# Altium PCB PCBvoice.PcbDoc
Units mm, origin at the board's own origin, x right, y up, seen from the top; angles counter-clockwise.
Board outline 100 x 60 mm, 2 copper layers (Top Layer, Bottom Layer); 35 components, 24 nets, 82 pads, 0 vias.
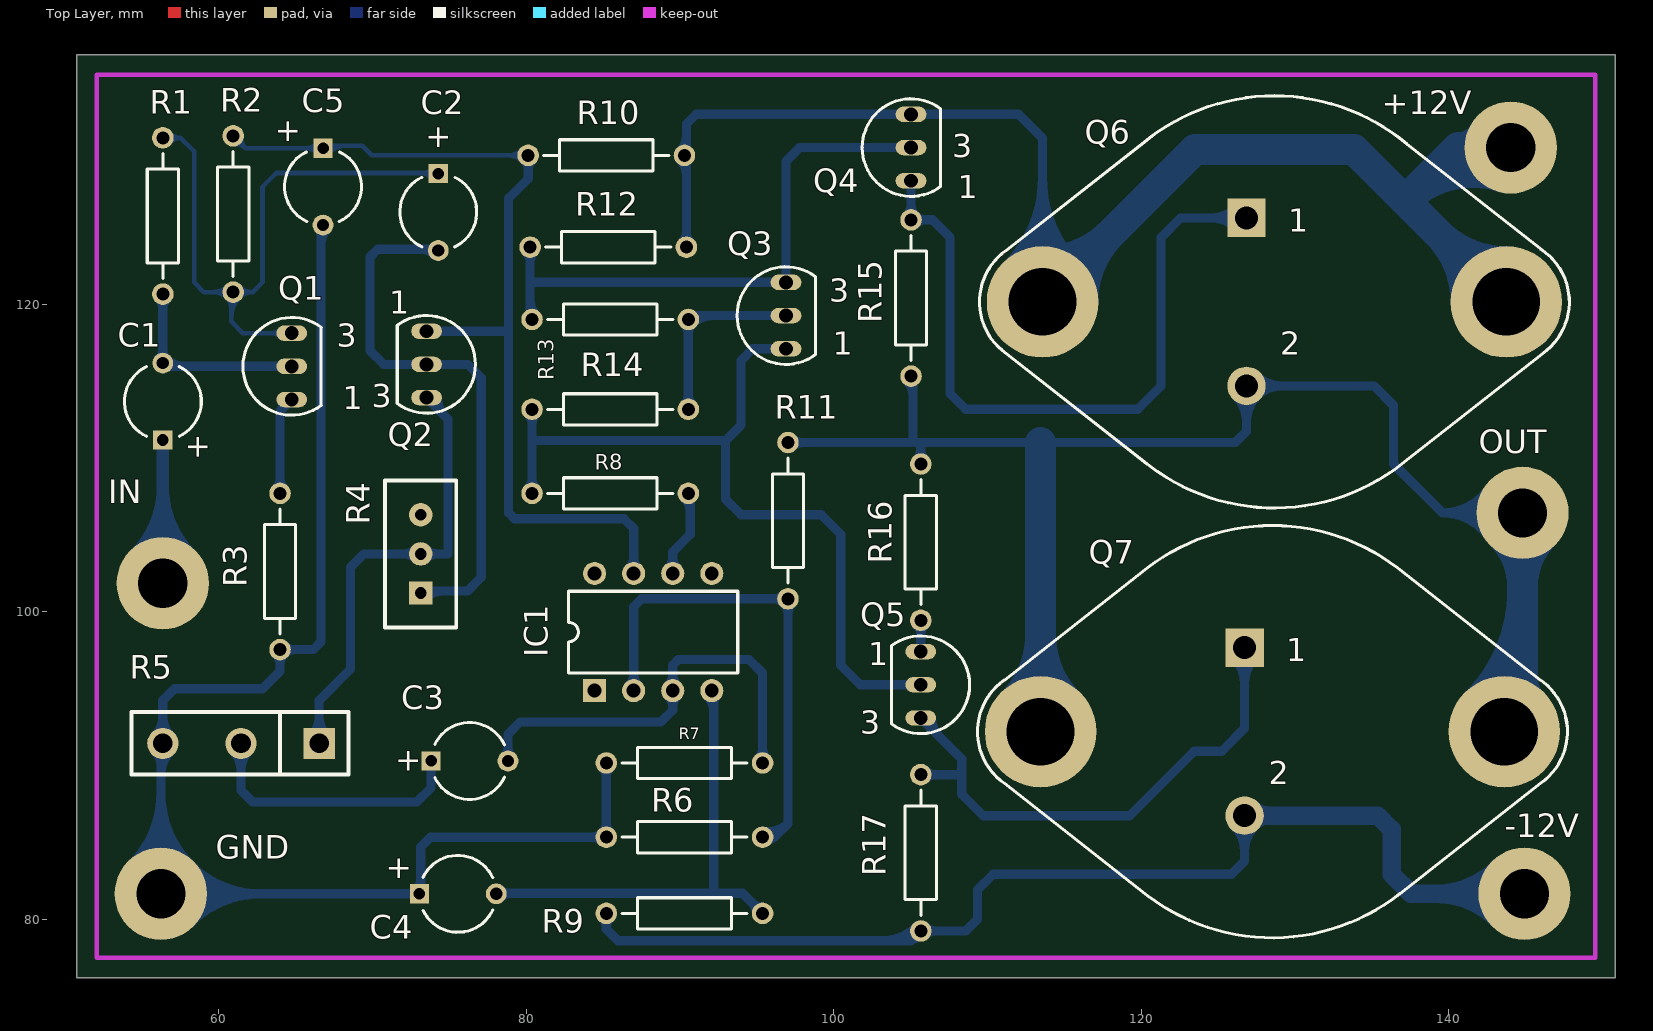
[diagram p0: Top Layer view]
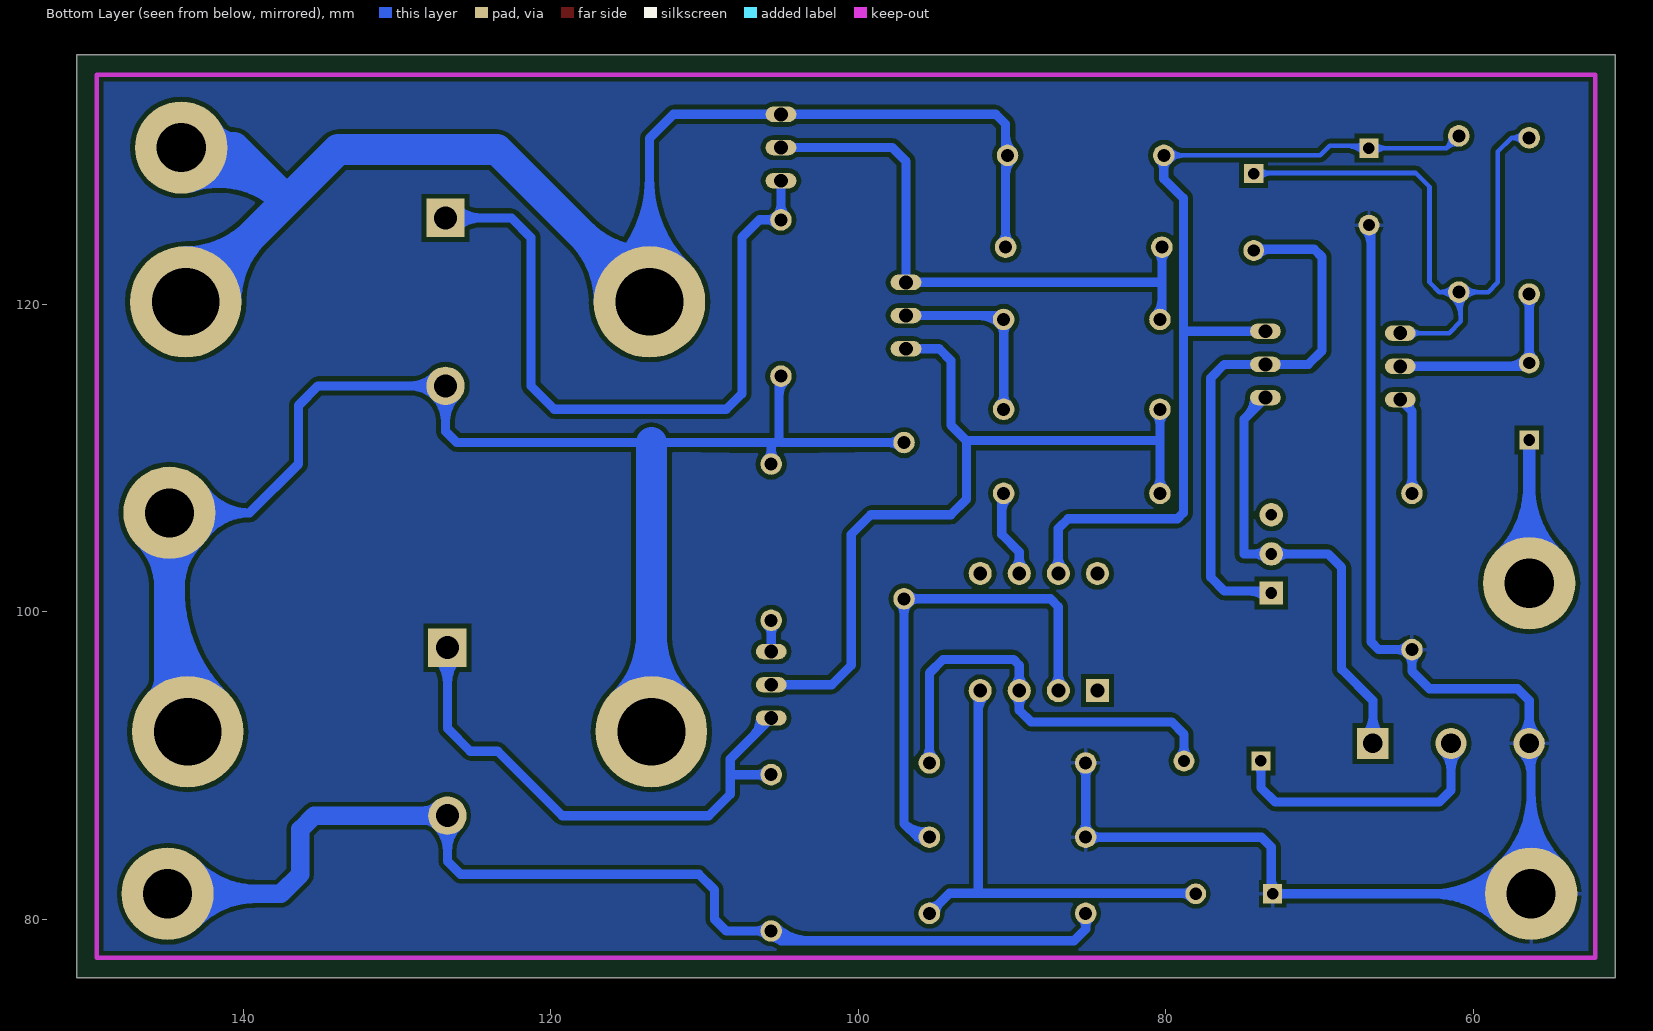
[diagram p1: Bottom Layer view, seen from below]

## Layer stack, top to bottom
Top Solder: solder mask 0.0102, Solder Resist, Dk 3.5
Top Layer: signal copper 0.0356
Dielectric 1: dielectric 0.32, FR-4, Dk 4.8
Bottom Layer: signal copper 0.0356
Bottom Solder: solder mask 0.0102, Solder Resist, Dk 3.5

## Board outline
50.8,76.2 150.8,76.2 150.8,136.2 50.8,136.2

## Design rules (kind name [scope] priority, off if disabled: settings)
Clearance [All] p1: gap=0.3
HoleSize [All] p1: absolutevalues=TRUE maxlimit=5 minlimit=0.025 maxpercent=80.000 minpercent=20.000
PolygonConnect [All] p1: connectstyle=Relief reliefconductorwidth=0.254 reliefentries=4 polygonreliefangle="90 Angle" airgapwidth=0.254
RoutingVias [All] p1: holewidth=0.8 width=1.6 viastyle="Through Hole" minholewidth=0.711 minwidth=1.27 maxholewidth=0.711 maxwidth=1.27
SilkToBoardRegionClearance [All] p1 off:
SilkToSolderMaskClearance [IsPad] p1: minsilkscreentomaskgap=0.1 clearancetoexposedcopper=TRUE
SolderMaskExpansion [All] p1: expansion=0.154
Width [All] p1: maxlimit=2 minlimit=0.3 preferedwidth=0.3
26 further rules are at their usual default settings.

## Components (designator, comment, footprint, x,y, rotation, side; value= is the part's Value field where it differs from the comment)
+12V "TP" TP2 144.018,130.175 r0 top
-12V "TP" TP2 144.907,81.661 r0 top
C1 "Cap Pol2" CAPPR5-5x5 56.388,113.665 r90 top
C2 "Cap Pol2" CAPPR5-5x5 74.295,125.984 r270 top
C3 "Cap Pol2" CAPPR5-5x5 76.327,90.297 r0 top
C4 "Cap Pol2" CAPPR5-5x5 75.565,81.661 r0 top
C5 "Cap Pol2" CAPPR5-5x5 66.802,127.635 r270 top
GND "TP" TP2 56.261,81.661 r0 top
IC1 "uA741" DIP8 88.265,98.679 r0 top
IN "TP" TP2 56.388,101.854 r0 top
OUT "TP" TP2 144.78,106.426 r0 top
Q1 "9014" TANS 64.77,115.951 r0 top
Q2 "9012" TANS 73.533,116.078 r180 top
Q3 "9014" TANS 96.901,119.253 r0 top
Q4 "8050" TANS 105.029,130.175 r0 top
Q5 "8550" TANS 105.664,95.25 r180 top
Q6 "2N3055" TO-3 128.651,120.142 r0 top
Q7 "2N3055" TO-3 128.524,92.202 r0 top
R1 "Res2" AXIAL-0.4 56.388,125.73 r90 top
R2 "Res2" AXIAL-0.4 60.96,125.857 r90 top
R3 "Res2" AXIAL-0.4 64.008,102.616 r90 top
R4 "vari-Res" vari-Res 73.152,103.759 r90 top
R5 "RPOT" RPOT 66.548,91.44 r180 top
R6 "Res2" AXIAL-0.4 90.297,85.344 r0 top
R7 "Res2" AXIAL-0.4 90.297,90.17 r0 top
R8 "Res2" AXIAL-0.4 85.471,107.696 r180 top
R9 "Res2" AXIAL-0.4 90.297,80.391 r180 top
R10 "Res2" AXIAL-0.4 85.217,129.667 r0 top
R11 "Res2" AXIAL-0.4 97.028,105.918 r90 top
R12 "Res2" AXIAL-0.4 85.344,123.698 r0 top
R13 "Res2" AXIAL-0.4 85.471,118.999 r180 top
R14 "Res2" AXIAL-0.4 85.471,113.157 r0 top
R15 "Res2" AXIAL-0.4 105.029,120.396 r90 top
R16 "Res2" AXIAL-0.4 105.664,104.521 r90 top
R17 "Res2" AXIAL-0.4 105.664,84.328 r90 top

## Footprints (in the part's own frame and the unit in brackets; to place one, negate y for a bottom-side part, rotate by r counter-clockwise, add the part's x,y. Pads: shape width x height; smd on the part's side, far side on the other; paste and mask are expansions set on the pad)
AXIAL-0.4 [mm] "Resistor; 2 Leads"
  round 1.4 hole 0.85: 1(-5.08,0) 2(5.08,0)
  silkscreen extent -4.06,-1.02 4.06,1.02
CAPPR5-5x5 [mm] "Capacitor, Electrolytic, Radial; Body 5 x 5 mm (Dia.xH typ); Pin Spacing 5 mm (typ)"
  rect 1.25x1.25 hole 0.75: 1(-2.5,0)
  round 1.35 hole 0.8: 2(2.5,0)
  silkscreen extent -2.26,-2.5 2.27,2.5
DIP8 [mm] "DIP; 8 Leads; Row Spacing 7.62 mm; Pitch 2.54 mm"
  rect 1.5x1.5 hole 0.9: 1(-3.81,-3.81)
  round 1.5 hole 0.9: 2(-1.27,-3.81) 3(1.27,-3.81) 4(3.81,-3.81) 5(3.81,3.81) 6(1.27,3.81) 7(-1.27,3.81) 8(-3.81,3.81)
  silkscreen extent -5.5,-2.65 5.5,2.65
RPOT [mil]
  rect 80x80 hole 50: 1(0,0)
  round 80 hole 50: 2(200,0) 3(400,0)
  silkscreen extent -75,-80 480,80
TANS [mm] "TO, Flat Index; 3 In-Line, Axial Leads; Body Dia. 4.5mm; Leads 0.51 x 0.48 mm (max)"
  oval 2x1 hole 0.9: 1(0,-2.159) 2(0,0) 3(0,2.159)
  silkscreen extent -3.17,-3.17 1.92,3.17
TO-3 [mm]
  rect 2.5x2.5 hole 1.5: 1(-1.815,5.46)
  round 2.5 hole 1.5: 2(-1.815,-5.46)
  round 7.25 hole 4.4: 3(-15.075,0) 3(15.075,0)
  silkscreen extent -19.17,-13.4 19.17,13.4
TP2 [mm]
  round 6 hole 3.2: 1(0,0)
vari-Res [mil]
  rect 60x60 hole 30: 1(-100,0)
  round 60 hole 30: 2(0,0) 3(100,0)
  silkscreen extent -188,-91 188,91

## Part data
C1 C2 C3 C4 C5: "Polarized Capacitor (Axial)"
IC1: "OAP"
Q1 Q3: library part 2N3904, "NPN General Purpose Amplifier"
Q2 Q5: "PNP Transistor"
Q4 Q6 Q7: "NPN General Purpose Amplifier"
R1 R2 R3 R6 R7 R8 R9 R10 R11 R12 R13 R14 R15 R16 R17: "Resistor"
R5: "Potentiometer"

## Nets (pads, with @x,y where several pads share a name; then routed paths per layer and width w, separated by ;. In a path a pad name is that pad's centre, name@x,y a point inside that pad or via, vN(x,y) a via of type N, cw(c..) or ccw(c..) an arc to the next point about the centre after c; other vN are vias at no path point)
1: IC1.1
8: IC1.8
+12V: +12V.1 Q4.3 Q6.3 R10.2 R12.2 | length 165.6
  Bottom Layer w0.6: R10.2@90.014,129.384 cw(c89.025,128.395) 90.424,128.395 ; R10.2@90.014,129.95 ccw(c89.025,130.939) 90.424,130.939 ; R12.2@90.141,123.981 ccw(c89.458,124.664) 90.424,124.664 ccw(c91.39,124.664) R12.2@90.707,123.981 ; R12.2 90.424,131.699 91.059,132.334 Q4.3 112.014,132.334 113.576,130.772 Q6.3@113.576,120.142 ; Q6.3@111.225,122.493 ccw(c105.549,128.169) 113.576,128.169 ccw(c121.603,128.169) Q6.3@115.927,122.493 ; Q6.3@111.649,122.069 ccw(c106.997,126.721) 113.576,126.721 ccw(c120.155,126.721) Q6.3@115.503,122.069 ; Q6.3@112.073,121.645 ccw(c108.446,125.272) 113.576,125.272 ccw(c118.706,125.272) Q6.3@115.079,121.645 ; Q6.3@112.498,121.22 ccw(c109.894,123.824) 113.576,123.824 ccw(c117.258,123.824) Q6.3@114.654,121.22
  Bottom Layer w2: Q6.3@113.576,120.142 123.482,130.048 133.82,130.048 137.141,126.727 ; Q6.3@113.576,122.767 ccw(c113.576,129.104) 118.057,124.623 ccw(c122.538,120.142) Q6.3@116.201,120.142 ; 139.475,129.061 cw(c142.666,125.87) +12V.1 140.589,130.175 ; Q6.3@141.101,120.142 ccw(c134.764,120.142) 139.245,124.623 ccw(c143.726,129.104) Q6.3@143.726,122.767 ; +12V.1@142.277,129.19 ccw(c140.589,128.236) 140.589,130.175 ; +12V.1@142.277,131.16 cw(c140.589,132.114) 140.589,130.175 ; +12V.1@143.419,128.267 ccw(c141.55,122.318) 137.141,126.727 ; Q6.3@143.726,120.142 137.141,126.727 ; 137.141,126.727 140.589,130.175
-12V: -12V.1 Q7.2 R9.2 R17.1 | length 93
  Bottom Layer w0.6: R9.2@84.934,80.108 cw(c84.251,79.425) 85.217,79.425 cw(c86.183,79.425) R9.2@85.5,80.108 ; R9.2 85.217,79.375 85.979,78.613 105.029,78.613 R17.1 108.585,79.248 109.347,80.01 109.347,81.915 110.363,82.931 125.857,82.931 126.709,83.783 Q7.2 ; 103.165,78.613 ccw(c103.165,81.747) R17.1@105.381,79.531 ; 104.614,78.613 ccw(c104.614,80.298) R17.1@105.805,79.107 ; R17.1@105.947,78.965 cw(c106.63,78.282) 106.63,79.248 cw(c106.63,80.214) R17.1@105.947,79.531 ; Q7.2@126.037,86.07 cw(c124.416,84.448) 126.709,84.448 cw(c129.003,84.448) Q7.2@127.381,86.07
  Bottom Layer w1.2: Q7.2 135.381,86.742 136.271,85.852 136.271,82.931 137.541,81.661 -12V.1 ; Q7.2@127.169,86.282 cw(c128.278,85.173) 128.278,86.742 cw(c128.278,88.311) Q7.2@127.169,87.202 ; -12V.1@143.21,79.964 ccw(c139.113,75.867) 139.113,81.661 ccw(c139.113,87.455) -12V.1@143.21,83.358
GND: C4.1 C5.2 GND.1 R3.1 R5.3 R6.1 R7.1 | length 153.4
  Bottom Layer w0.6: GND.1@54.352,83.57 ccw(c49.743,88.179) 56.261,88.179 ccw(c62.779,88.179) 58.17,83.57 ccw(c62.779,88.179) 62.779,81.661 ccw(c62.779,75.143) GND.1@58.17,79.752 ; GND.1@54.776,83.146 ccw(c51.191,86.731) 56.261,86.731 ccw(c61.331,86.731) 57.746,83.146 ccw(c61.331,86.731) 61.331,81.661 ccw(c61.331,76.591) GND.1@57.746,80.176 ; GND.1@55.2,82.722 ccw(c52.64,85.282) 56.261,85.282 ccw(c59.882,85.282) 57.322,82.722 ccw(c59.882,85.282) 59.882,81.661 ccw(c59.882,78.04) GND.1@57.322,80.6 ; R5.3@55.882,90.934 cw(c54.966,90.018) 56.261,90.018 ; R5.3@55.882,91.946 ccw(c54.659,93.169) 56.388,93.169 ccw(c58.117,93.169) R5.3@56.894,91.946 ; 56.261,89.405 cw(c58.423,89.405) R5.3@56.894,90.934 ; R3.1@63.725,97.253 cw(c63.042,96.57) 64.008,96.57 cw(c64.974,96.57) 64.291,97.253 cw(c64.974,96.57) 64.974,97.536 cw(c64.974,98.502) R3.1@64.291,97.819 ; 66.675,123.923 cw(c68.014,123.923) C5.2@67.067,124.87 ; C5.2 66.675,125.008 66.675,98.044 66.167,97.536 R3.1 64.008,96.139 62.865,94.996 57.15,94.996 56.388,94.234 R5.3 56.261,91.313 GND.1 C4.1 73.152,81.748 73.152,84.709 73.787,85.344 R6.1 R7.1 ; C4.1@72.835,81.431 ccw(c72.28,80.876) 72.28,81.661 ccw(c72.28,82.446) 72.835,81.891 ccw(c72.07,82.656) 73.152,82.656 ; R6.1@84.934,85.061 ccw(c84.251,84.378) 84.251,85.344 ccw(c84.251,86.31) 84.934,85.627 ccw(c84.251,86.31) 85.217,86.31 ccw(c86.183,86.31) R6.1@85.5,85.627 ; R7.1@84.934,89.887 cw(c84.251,89.204) 85.217,89.204 cw(c86.183,89.204) R7.1@85.5,89.887
NetC1_1: C1.1 IN.1 | length 26
  Bottom Layer w0.8: IN.1@54.55,103.692 ccw(c50.111,108.131) 56.388,108.131 ccw(c62.665,108.131) IN.1@58.226,103.692 ; IN.1@55.115,103.127 ccw(c52.042,106.2) 56.388,106.2 ccw(c60.734,106.2) IN.1@57.661,103.127 ; IN.1 C1.1
NetC1_2: C1.2 Q1.2 R1.1 | length 17.3
  Bottom Layer w0.3: Q1.2@64.683,116.038 Q1.2
  Bottom Layer w0.6: R1.1@56.105,120.367 cw(c55.422,119.684) 56.388,119.684 cw(c57.354,119.684) R1.1@56.671,120.367 ; C1.2@56.123,116.43 ccw(c55.483,117.07) 56.388,117.07 ccw(c57.293,117.07) 56.653,116.43 ccw(c57.81,117.587) 57.81,115.951 ; R1.1 C1.2 56.602,115.951 Q1.2
NetC2_1: C2.1 Q1.3 R1.2 R2.1 | length 51.6
  Bottom Layer w0.3: R1.2 57.531,130.81 ; R1.2@56.818,130.467 cw(c57.531,129.897) 57.531,130.81 ; R1.2@56.818,131.153 ccw(c57.531,131.723) 57.531,130.81 ; R2.1@60.571,121.166 cw(c59.632,122.105) 59.632,120.777 cw(c59.632,119.449) 60.571,120.388 cw(c59.939,119.756) 60.833,119.756 ; 60.833,119.143 cw(c62.594,119.143) R2.1@61.349,120.388 ; 60.833,119.867 cw(c61.87,119.867) R2.1@61.137,120.6 ; R2.1@60.833,120.65 60.833,118.872 61.595,118.11 Q1.3 ; R2.1@61.361,120.401 cw(c62.23,119.586) 62.23,120.777 ; R2.1@61.361,121.153 ccw(c62.23,121.968) 62.23,120.777 ; Q1.3@64.023,117.863 ccw(c63.425,117.265) 63.425,118.11 ccw(c63.425,118.955) Q1.3@64.023,118.357 ; 73.052,128.524 cw(c73.052,127.241) C2.1@73.959,128.148 ; 73.245,128.524 ccw(c73.245,129.534) C2.1@73.959,128.82 ; C2.1@74.255,128.524 63.754,128.524 62.865,127.635 62.865,121.412 62.23,120.777 ; 57.531,130.81 58.42,129.921 58.42,121.412 59.055,120.777 R2.1 62.23,120.777
NetC2_2: C2.2 Q2.2 R4.1 | length 39.5
  Bottom Layer w0.6: R4.1 73.279,101.346 76.2,101.346 77.089,102.235 77.089,115.189 76.2,116.078 Q2.2 70.739,116.078 69.85,116.967 69.85,123.063 70.358,123.571 C2.2@74.208,123.571 ; 73.18,123.571 cw(c73.18,122.369) C2.2@74.03,123.219 ; R4.1@73.479,100.892 cw(c74.574,99.797) 74.574,101.346 ; R4.1@73.479,101.546 ccw(c73.961,102.028) 73.961,101.346 ; 73.6,123.571 ccw(c73.6,124.179) C2.2@74.03,123.749 ; C2.2@74.001,123.19 C2.2
NetC3_1: C3.1 R5.2 | length 21.8
  Bottom Layer w0.6: R5.2@60.962,90.934 cw(c59.739,89.711) 61.468,89.711 cw(c63.197,89.711) R5.2@61.974,90.934 ; R5.2 61.468,88.392 62.23,87.63 72.898,87.63 73.827,88.559 C3.1 ; C3.1@73.597,90.067 cw(c73.042,89.512) 73.827,89.512 cw(c74.612,89.512) C3.1@74.057,90.067
NetC3_2: C3.2 IC1.3 R7.2 | length 34.6
  Bottom Layer w0.6: C3.2@78.562,90.562 ccw(c77.922,91.202) 78.827,91.202 ccw(c79.732,91.202) C3.2@79.092,90.562 ; C3.2 78.827,92.035 79.629,92.837 88.773,92.837 89.535,93.599 IC1.3 89.535,96.52 89.916,96.901 94.488,96.901 95.377,96.012 R7.2 ; IC1.3@89.217,94.551 cw(c88.449,93.783) 89.535,93.783 cw(c90.621,93.783) IC1.3@89.853,94.551 ; IC1.3@89.217,95.187 ccw(c88.449,95.955) 89.535,95.955 ccw(c90.621,95.955) IC1.3@89.853,95.187 ; R7.2@95.094,90.453 ccw(c94.411,91.136) 95.377,91.136 ccw(c96.343,91.136) R7.2@95.66,90.453
NetC4_2: C4.2 IC1.4 R9.1 | length 35.7
  Bottom Layer w0.6: C4.2 78.095,81.691 92.202,81.691 ; C4.2@78.33,81.396 cw(c79.043,80.683) 79.043,81.691 ; C4.2@78.33,81.926 ccw(c78.898,82.494) 78.898,81.691 ; IC1.4@91.757,94.551 cw(c90.682,93.476) 92.202,93.476 ; IC1.4 92.202,94.742 92.202,81.691 ; 92.202,94.089 cw(c92.855,94.089) IC1.4@92.393,94.551 ; R9.1@94.977,80.391 ccw(c94.011,80.391) 94.694,81.074 ccw(c95.377,81.757) R9.1@95.377,80.791 ; R9.1 94.077,81.691 92.202,81.691
NetC5_1: C5.1 IC1.7 Q2.1 R2.2 R10.1 | length 71.5
  Bottom Layer w0.3: R2.2 61.762,130.135 ; R2.2@61.025,130.391 cw(c61.13,129.503) 61.762,130.135 ; R2.2@61.506,130.872 ccw(c62.394,130.767) 61.762,130.135 ; C5.1@66.466,129.799 ccw(c65.655,128.988) 65.655,130.135 ccw(c65.655,131.282) C5.1@66.466,130.471 ; C5.1 61.762,130.135 ; C5.1@66.926,130.011 cw(c67.628,129.309) 67.628,130.302 ; C5.1@66.969,130.302 69.342,130.302 69.977,129.667 R10.1 ; C5.1@67.138,129.799 cw(c68.352,128.585) 68.352,130.302 ; C5.1@67.138,130.471 ccw(c67.546,130.879) 67.546,130.302 ; R10.1@79.748,129.278 ccw(c78.809,128.339) 78.809,129.667 ccw(c78.809,130.995) R10.1@79.748,130.056
  Bottom Layer w0.6: Q2.1 78.74,118.237 78.867,118.364 ; R10.1@79.854,129.384 cw(c79.171,128.701) 80.137,128.701 cw(c81.103,128.701) R10.1@80.42,129.384 ; R10.1 80.137,128.143 78.867,126.873 78.867,118.364 ; IC1.7@86.677,102.807 ccw(c85.909,103.575) 86.995,103.575 ccw(c88.081,103.575) IC1.7@87.313,102.807 ; IC1.7 86.995,105.41 86.36,106.045 79.248,106.045 78.867,106.426 78.867,118.364
NetIC1_2: IC1.2 R6.2 R11.1 | length 40.8
  Bottom Layer w0.6: IC1.2@86.677,95.187 ccw(c85.909,95.955) 86.995,95.955 ccw(c88.081,95.955) IC1.2@87.313,95.187 ; IC1.2 86.995,100.33 87.503,100.838 R11.1 97.028,86.233 ; R6.2@95.342,85.147 ccw(c95.517,86.121) 96.216,85.421 ; R6.2 96.139,85.344 ; R6.2@95.448,85.738 ccw(c95.764,87.497) 97.028,86.233 ; R6.2@95.706,85.117 cw(c96.139,84.818) 96.139,85.344 ; R6.2@95.706,85.571 ccw(c96.139,85.87) 96.139,85.344 ; R11.1@96.745,101.121 cw(c96.062,101.804) 96.062,100.838 cw(c96.062,99.872) 96.745,100.555 cw(c96.062,99.872) 97.028,99.872 cw(c97.994,99.872) R11.1@97.311,100.555 ; 96.139,85.344 97.028,86.233
NetIC1_6: IC1.6 R8.1 | length 8.5
  Bottom Layer w0.6: IC1.6@89.217,102.807 ccw(c88.449,103.575) 89.535,103.575 ccw(c90.621,103.575) IC1.6@89.853,102.807 ; IC1.6 89.535,103.886 90.678,105.029 90.678,107.569 R8.1 ; R8.1@90.268,107.413 cw(c89.279,106.424) 90.678,106.424
NetOUT_1: OUT.1 Q6.2 Q7.3 R11.2 R15.1 R16.2 | length 151.6
  Bottom Layer w0.6: R11.2 105.029,110.998 105.156,111.125 ; R11.2@97.311,110.715 cw(c97.994,110.032) 97.994,110.998 cw(c97.994,111.964) R11.2@97.311,111.281 ; R15.1@104.746,115.033 cw(c103.757,114.044) 105.156,114.044 ; R15.1 105.156,115.189 105.156,111.125 ; R16.2@105.381,109.884 ccw(c104.698,110.567) 105.664,110.567 ccw(c106.63,110.567) R16.2@105.947,109.884 ; R16.2 105.664,110.998 ; Q6.2@126.164,114.01 cw(c124.543,112.388) 126.836,112.388 cw(c129.13,112.388) 127.508,114.01 cw(c129.13,112.388) 129.13,114.682 cw(c129.13,116.975) Q6.2@127.508,115.354 ; OUT.1@142.573,104.87 ccw(c139.573,102.756) 139.573,106.426 ; OUT.1@142.573,107.982 cw(c139.573,110.096) 139.573,106.426 ; OUT.1@143.064,105.216 ccw(c140.73,103.571) 140.73,106.426 ccw(c140.73,109.281) OUT.1@143.064,107.636 ; Q7.3@143.599,92.202 Q7.3@144.78,93.383 ; OUT.1 139.573,106.426 ; 105.156,111.125 105.283,110.998 105.664,110.998 ; 105.664,110.998 113.449,110.998 126.111,110.998 126.836,111.723 Q6.2 135.127,114.682 136.398,113.411 136.398,109.601 139.573,106.426
  Bottom Layer w2: Q7.3@111.593,94.058 ccw(c107.112,98.539) 113.449,98.539 ccw(c119.786,98.539) Q7.3@115.305,94.058 ; Q7.3@113.449,92.202 113.449,110.998 ; Q7.3@141.743,94.058 ccw(c134.411,101.391) 144.78,101.391 ; Q7.3@143.157,92.644 ccw(c139.239,96.562) 144.78,96.562 ; OUT.1@143.366,105.012 cw(c139.952,101.598) 144.78,101.598 cw(c149.608,101.598) OUT.1@146.194,105.012 ; Q7.3@144.78,93.383 OUT.1 ; 144.78,95.688 ccw(c147.085,95.688) Q7.3@145.455,94.058
NetQ1_1: Q1.1 R3.2 | length 8.6
  Bottom Layer w0.6: R3.2@63.725,107.979 ccw(c63.042,108.662) 64.008,108.662 ccw(c64.974,108.662) R3.2@64.291,107.979 ; R3.2 64.008,113.03 ; Q1.1@64.096,113.693 cw(c63.619,113.419) 64.008,113.03 ; Q1.1 64.008,113.03
NetQ2_3: Q2.3 R4.2 R5.1 | length 37.3
  Bottom Layer w0.6: R5.1@66.042,91.946 ccw(c64.819,93.169) 66.548,93.169 ccw(c68.277,93.169) R5.1@67.054,91.946 ; R5.1 66.548,94.234 68.58,96.266 68.58,102.87 69.469,103.759 R4.2 74.93,103.759 74.93,112.522 Q2.3 ; R4.2@72.825,103.432 ccw(c72.037,102.644) 72.037,103.759 ccw(c72.037,104.874) R4.2@72.825,104.086 ; R4.2@73.479,103.432 cw(c74.267,102.644) 74.267,103.759 cw(c74.267,104.874) R4.2@73.479,104.086 ; Q2.3@74.233,113.919 ccw(c75.923,113.919) 74.728,112.724
NetQ3_1: Q3.1 Q5.2 R8.2 R14.1 | length 56.4
  Bottom Layer w0.6: R8.2@80.108,107.979 ccw(c79.425,108.662) 80.391,108.662 ccw(c81.357,108.662) R8.2@80.674,107.979 ; R14.1@80.108,112.874 cw(c79.425,112.191) 80.391,112.191 cw(c81.357,112.191) R14.1@80.674,112.874 ; R8.2 80.391,111.125 ; R14.1 80.391,111.125 ; Q3.1 94.742,117.094 93.98,116.332 93.98,112.141 92.964,111.125 ; Q5.2 101.727,95.25 100.457,96.52 100.457,105.029 99.187,106.299 93.98,106.299 92.964,107.315 92.964,111.125 ; 80.391,111.125 92.964,111.125
NetQ3_2: Q3.2 R13.1 R14.2 | length 16.8
  Bottom Layer w0.6: R14.2@90.268,113.44 ccw(c89.585,114.123) 90.551,114.123 ccw(c91.517,114.123) R14.2@90.834,113.44 ; R13.1@90.268,118.716 cw(c89.585,118.033) 90.551,118.033 cw(c91.517,118.033) 90.834,118.716 cw(c92.13,117.42) 92.13,119.253 ; R14.2 R13.1 90.805,119.253 Q3.2
NetQ3_3: Q3.3 Q4.2 R12.1 R13.2 | length 40.4
  Bottom Layer w0.6: R12.1@79.981,123.415 cw(c79.298,122.732) 80.264,122.732 cw(c81.23,122.732) R12.1@80.547,123.415 ; 80.264,120.271 ccw(c81.663,120.271) R13.2@80.674,119.282 ; R12.1 80.264,121.412 ; R13.2 80.264,119.126 80.264,121.412 ; Q4.2 97.79,130.175 96.901,129.286 Q3.3 80.264,121.412
NetQ4_1: Q4.1 Q6.1 R15.2 | length 52.8
  Bottom Layer w0.6: R15.2@104.746,125.759 ccw(c104.063,126.442) 105.029,126.442 ccw(c105.995,126.442) 105.312,125.759 ccw(c105.995,126.442) 105.995,125.476 ccw(c105.995,124.51) R15.2@105.312,125.193 ; Q4.1 R15.2 106.426,125.476 107.569,124.333 107.569,114.173 108.585,113.157 119.761,113.157 121.285,114.681 121.285,124.333 122.554,125.602 Q6.1 ; Q6.1@126.164,124.93 ccw(c124.543,123.308) 124.543,125.602 ccw(c124.543,127.895) Q6.1@126.164,126.274
NetQ5_1: Q5.1 R16.1 | length 3.5
  Bottom Layer w0.6: R16.1@105.381,99.158 cw(c104.698,98.475) 105.664,98.475 cw(c106.63,98.475) R16.1@105.947,99.158 ; Q5.1 R16.1
NetQ5_3: Q5.3 Q7.1 R17.2 | length 41.8
  Bottom Layer w0.6: R17.2 108.204,89.408 108.331,89.535 ; Q5.3 108.331,90.424 108.331,89.535 ; R17.2@105.947,89.125 cw(c106.63,88.442) 106.63,89.408 cw(c106.63,90.374) R17.2@105.947,89.691 ; Q5.3@106.364,93.091 ccw(c108.054,93.091) 106.859,91.896 ; Q7.1@126.037,96.99 cw(c124.416,95.368) 126.709,95.368 cw(c129.003,95.368) Q7.1@127.381,96.99 ; Q7.1 126.709,92.419 125.222,90.932 123.444,90.932 119.253,86.741 109.728,86.741 108.331,88.138 108.331,89.535
pads on no net: IC1.5 R4.3

## Polygon pours and split planes (outlines as drawn)
GND on Bottom Layer "Bottom Layer-No Net" (solid, remove dead copper, pour order 2): 153.67,71.501 153.543,71.628 153.543,139.192 46.609,139.192 46.355,138.938 46.355,72.009 46.101,72.263

## Keep-outs
Keep-Out Layer:
  lines w0.3: 52.1,77.5 52.1,134.9 149.5,134.9 149.5,77.5 52.1,77.5

## Dimensions
52.1,77.5 to 52.1,134.9 on Mechanical 1
52.1,77.5 to 149.5,77.5 on Mechanical 1

## Text inside footprints (layer, text, board x,y; h text height)
C1: Top Overlay "+" at 59.309,109.855 h1.5 r90
C2: Top Overlay "+" at 73.66,131.699 h1.5 r270
C3: Top Overlay "+" at 71.501,89.662 h1.5
C4: Top Overlay "+" at 70.866,82.677 h1.5
C5: Top Overlay "+" at 63.881,132.08 h1.5 r270
Q1: Top Overlay "3" at 67.691,117.221 h1.5; Top Overlay "1" at 68.072,113.157 h1.5
Q2: Top Overlay "3" at 69.977,113.284 h1.5; Top Overlay "1" at 71.12,119.38 h1.5
Q3: Top Overlay "3" at 99.695,120.142 h1.5; Top Overlay "1" at 99.949,116.713 h1.5
Q4: Top Overlay "3" at 107.696,129.54 h1.5; Top Overlay "1" at 108.077,126.873 h1.5
Q5: Top Overlay "3" at 101.727,92.075 h1.5; Top Overlay "1" at 102.235,96.52 h1.5
Q6: Top Overlay "1" at 129.54,124.714 h1.5; Top Overlay "2" at 129.032,116.713 h1.5
Q7: Top Overlay "1" at 129.413,96.774 h1.5; Top Overlay "2" at 128.27,88.773 h1.5